# EAGLE board 3221961-eagle-breadboard-export-20161128-24114-12l7d3l (EAGLE 7.6.0)

Size 56.82 x 53.33 mm. Coordinates in mm from the lower left corner, seen from the top.
Outline: 0,0 56.82,0 56.82,53.33 0,53.33 0,0
Copper layers (1*16): Top 0.035mm / dielectric 1.5mm / Bottom 0.035mm
Design rules "default": minimum track width 10mil, minimum drill 24mil, track to track 8mil, track to pad 8mil, pad to pad 8mil, via to via 8mil, smd to smd 8mil, copper to edge 40mil, drill to drill 8mil, minimum pad ring 10mil, minimum via ring 8mil, stop-mask expansion 4mil, vias tented up to drill 0mil, thermal gap 10mil

## Footprints (pad centres in the part's own frame; a part is rotated, then mirrored left to right if it is on the bottom)
PT-10 = drill 1.016 octagon: A -2.54,-5.08; E 2.54,-5.08; S 0,5.08

## Placement (x,y rotation side)
R1  [PT-10]  5,10.08 0 top
R2  [PT-10]  5,22.78 0 top
R3  [PT-10]  5,35.48 0 top

## Library data of the parts
R1-R3 = AUTODESK_CIRCUITS_BREADBOARD

## Nets
N$1: R3.E
N$2: R2.E
N$3: R1.A
N$4: R1.E R2.A R3.A
N$5: R1.S R2.S R3.S

## Tracks (layer width: path | path; a pad name or v marks a point on that pad's centre or on a via)
N$4  (2 unrouted)
N$5  (2 unrouted)